# EAGLE board LED_strip (EAGLE 6.4)
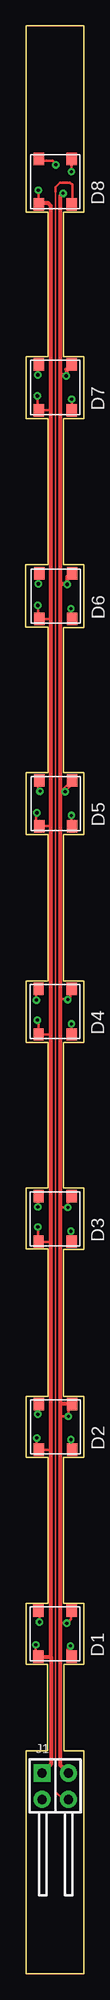
[diagram p0: board, top side]
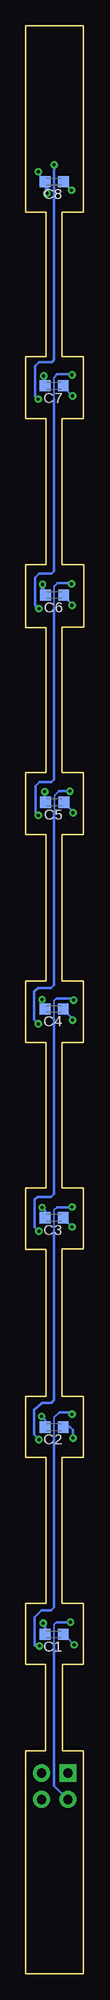
[diagram p1: board, bottom side, seen from below]

Size 5.62 x 187.51 mm. Coordinates in mm from the lower left corner, seen from the top.
Outline: 0.05,187.51 5.62,187.51 5.62,169.57 3.65,169.57 3.65,155.65 5.62,155.65 5.62,149.71 3.65,149.71 3.65,135.63 5.62,135.63 5.62,129.59 3.65,129.59 3.65,115.62 5.62,115.62 5.62,109.67 3.65,109.67 3.65,95.55 5.62,95.55 5.62,89.66 3.65,89.66 3.65,75.64 5.62,75.64 5.62,69.7 3.65,69.7 3.65,55.57 5.62,55.57 5.62,49.68 3.65,49.68 3.65,35.66 5.62,35.66 5.62,29.77 3.7,29.77 3.7,21.44 5.62,21.44 5.62,0 0.05,0 0.05,21.44 2.07,21.44 2.07,29.77 0.05,29.77 0.05,35.66 2.13,35.66 2.13,49.68 0.05,49.68 0.05,55.57 2.13,55.57 2.13,69.75 0.05,69.75 0.05,75.64 2.13,75.64 2.13,89.66 0.05,89.66 0.05,95.55 2.13,95.55 2.13,109.67 0.05,109.67 0.05,115.62 2.13,115.62 2.13,129.64 0,129.64 0,135.63 2.13,135.63 2.13,149.71 0.05,149.71 0.05,155.65 2.13,155.65 2.13,169.57 0.05,169.57 0.05,187.51
Copper layers (1*16): Top 0.035mm / dielectric 1.5mm / Bottom 0.035mm
Design rules "default": minimum track width 10mil, minimum drill 24mil, track to track 8mil, track to pad 8mil, pad to pad 8mil, via to via 8mil, smd to smd 8mil, copper to edge 40mil, drill to drill 8mil, minimum pad ring 10mil, minimum via ring 8mil, stop-mask expansion 4mil, vias tented up to drill 0mil, thermal gap 10mil

## Footprints (pad centres in the part's own frame; a part is rotated, then mirrored left to right if it is on the bottom)
C0603K = smd 1.05 x 1.08: 1 -0.875,0; 2 0.875,0
WS2812B = smd 1.2 x 1: DI 4.4,0; DO 0,-3.2; VDD 0,0; VSS 4.4,-3.2
2X2P-2.54 = drill 0.889 pad 1.651 square: 1 -1.27,1.27 | drill 0.889 pad 1.651: 2 -1.27,-1.27; 3 1.27,-1.27; 4 1.27,1.27

## Placement (x,y rotation side)
C1  [C0603K]  2.89,32.67 180 bottom
C2  [C0603K]  2.88,52.62 180 bottom
C3  [C0603K]  2.89,72.77 180 bottom
C4  [C0603K]  2.89,92.87 180 bottom
C5  [C0603K]  2.83,112.77 180 bottom
C6  [C0603K]  2.84,132.71 180 bottom
C7  [C0603K]  2.89,152.87 180 bottom
C8  [C0603K]  2.88,172.51 180 bottom
D1  [WS2812B]  1.21,30.52 90 top
D2  [WS2812B]  1.26,50.43 90 top
D3  [WS2812B]  1.23,70.46 90 top
D4  [WS2812B]  1.23,90.41 90 top
D5  [WS2812B]  1.28,110.46 90 top
D6  [WS2812B]  1.28,130.41 90 top
D7  [WS2812B]  1.25,150.51 90 top
D8  [WS2812B]  1.24,170.31 90 top
J1  CONNECTOR-HEADER-2X2P  [2X2P-2.54]  2.84,18.03 0 top

## Library data of the parts
C1-C8 = resistor
D1-D8 = lumex
J1 = OPL Eagle Library

## Nets
+5V: C1.1 C2.1 C3.1 C4.1 C5.1 C6.1 C7.1 C8.1 D1.VDD D2.VDD D3.VDD D4.VDD D5.VDD D6.VDD D7.VDD D8.VDD J1.1
DIN: D1.DI J1.2
DOUT: D8.DO J1.3
GND: C1.2 C2.2 C3.2 C4.2 C5.2 C6.2 C7.2 C8.2 D1.VSS D2.VSS D3.VSS D4.VSS D5.VSS D6.VSS D7.VSS D8.VSS J1.4
N$1: D1.DO D2.DI
N$2: D2.DO D3.DI
N$3: D3.DO D4.DI
N$4: D4.DO D5.DI
N$5: D5.DO D6.DI
N$6: D6.DO D7.DI
N$7: D7.DO D8.DI

## Tracks (layer width: path | path; a pad name or v marks a point on that pad's centre or on a via)
+5V  (via drill 0.3)
  Top 0.254: v0.96,31.65 0.96,30.73 D1.VDD 1.21,30.48 | v1.06,51.56 1.06,50.54 D2.VDD 2.23,50.43 2.43,50.24 | v1.11,91.79 1.13,91.77 1.23,91.77 D4.VDD 2.29,90.41 2.43,90.27 | v1.06,111.76 1.01,111.71 1.01,111 1.13,110.87 D5.VDD 2.3,110.46 2.43,110.34 | v1.16,131.72 1.16,130.44 D6.VDD 2.32,130.41 2.43,130.3 | v1.11,151.89 1.11,150.53 D7.VDD 2.28,150.51 2.28,150.46 2.43,150.31 | v1.21,171.7 1.21,170.34 D8.VDD | 2.43,70.61 2.28,70.46 D3.VDD 1.16,70.49 v1.16,71.88
  Top 0.406: 2.43,30.48 2.43,50.24 2.43,70.61 2.43,90.27 2.43,110.34 2.43,130.3 2.43,150.31 2.43,170.18 2.18,170.43 1.36,170.43 D8.VDD | 1.21,30.48 2.43,30.48 | 2.43,30.48 2.43,20.17 J1.1
  Bottom 0.254: C1.1 1.71,32.4 v0.96,31.65 | C2.1 1.35,52.62 1.06,52.32 v1.06,51.56 | C4.1 1.11,91.97 v1.11,91.79 | C5.1 1.06,111.87 v1.06,111.76 | C6.1 1.96,132.62 1.16,131.82 v1.16,131.72 | C7.1 2.01,152.79 v1.11,151.89 | C8.1 2.01,172.5 v1.21,171.7 | C3.1 2.01,72.73 v1.16,71.88
DIN  (via drill 0.3)
  Top 0.254: v1.31,33.83 1.31,34.77 D1.DI
  Bottom 0.152: 2.89,31.7 2.89,33.63 2.68,33.83
  Bottom 0.254: 2.68,33.83 v1.31,33.83 | J1.2 2.89,18.08 2.89,31.7
DOUT
  Top 0.152: 2.89,171.55 2.89,17.5
  Top 0.254: J1.3 3.62,16.76 2.89,17.5 | D8.DO 4.48,170.31 4.48,172.21 4.28,172.41 3.58,172.41 3.29,172.41 2.89,172.01 2.89,171.55
GND  (via drill 0.3)
  Top 0.254: v4.06,93.77 4.11,93.83 | v3.8,113.79 4.33,114.32 D5.VSS 4.33,114.78 3.35,113.79 | 4.21,134.69 D6.VSS | v3.9,153.82 3.9,153.87 | 3.9,154.43 3.9,154.52 D7.VSS | v4.41,173.48 4.41,174.68 D8.VSS | 4.36,34.75 4.36,34.14 v3.95,33.73 | D4.VSS 4.33,94.05 4.11,93.83 | 4.11,93.83 3.4,93.83 3.35,93.77 | 3.35,73.76 v4.06,73.76 4.06,74.59 D3.VSS | D1.VSS 4.36,34.09 4.06,33.78 3.35,33.78 | 3.35,53.69 3.4,53.64 v4.11,53.64 4.11,54.58 D2.VSS
  Top 0.406: D1.VSS 4.36,34.75 | D2.VSS 3.37,54.83 | 3.35,133.75 3.35,113.79 3.35,93.77 3.35,73.76 3.35,53.69 3.35,33.78 3.35,20.06 J1.4 | 3.35,133.75 3.35,153.82 | 3.35,153.82 3.35,171.14 v3.6,171.4 | D7.VSS 4.24,154.77 3.9,154.43 3.9,153.87 3.4,153.87 3.35,153.82 | 3.35,133.75 v4.01,133.75 4.01,134.48 D6.VSS
  Bottom 0.254: C2.2 3.76,53.29 v4.11,53.64 | C4.2 4.06,93.16 v4.06,93.77 | C5.2 3.8,112.86 v3.8,113.79 | C7.2 3.76,153.68 v3.9,153.82 | C8.2 3.76,172.57 4.41,173.23 v4.41,173.48 | C1.2 3.76,33.54 v3.95,33.73 | C3.2 3.76,73.46 v4.06,73.76
  Bottom 0.406: v3.6,171.4 3.6,172.35 C8.2 | v4.01,133.75 4.01,133.01 C6.2
N$1  (via drill 0.3)
  Top 0.254: D1.DO 4.13,30.96 | 4.13,30.96 4.01,31.19 | v1.16,53.85 1.16,54.83 D2.DI | v4.31,31.54 4.31,31.14 4.13,30.96
  Bottom 0.152: 2.89,51.46 2.89,53.54 2.38,54.05
  Bottom 0.254: 4.77,31.6 4.77,31.8 | 4.77,31.8 4.77,34.29 4.11,34.95 3.19,34.95 2.89,35.25 2.89,51.46 | 2.38,54.05 1.36,54.05 v1.16,53.85 | v4.31,31.54 4.51,31.54 4.77,31.8
N$2  (via drill 0.3)
  Top 0.254: D2.DO v4.36,51.41 | v1.16,73.81 1.16,74.83 D3.DI
  Bottom 0.152: 2.89,71.52 2.89,73.51 2.63,73.76
  Bottom 0.254: v4.36,51.41 4.36,51.46 4.82,51.92 4.82,54.25 4.06,54.96 3.14,54.96 2.89,55.22 2.89,71.52 | 2.63,73.76 1.21,73.76 v1.16,73.81
N$3  (via drill 0.3)
  Top 0.254: D3.DO 4.33,71.44 v4.36,71.47 | v1.01,93.72 1.01,94.69 D4.DI
  Bottom 0.152: 2.89,91.84 2.89,93.67 2.68,93.88
  Bottom 0.254: v4.36,71.47 4.77,71.88 4.77,74.52 4.51,74.78 3.19,74.78 2.89,75.08 2.89,91.84 | 2.68,93.88 1.16,93.88 v1.01,93.72
N$4  (via drill 0.3)
  Top 0.254: D4.DO 4.41,90.49 v4.41,91.44 | v1.36,113.84 1.13,113.92 D5.DI
  Bottom 0.152: 2.89,95.2 2.84,113.43 2.43,113.84
  Bottom 0.254: v4.41,91.44 4.82,91.84 4.82,94.54 4.46,94.89 3.19,94.89 2.89,95.2 2.89,111.71 2.84,111.71 | 2.43,113.84 v1.36,113.84
N$5  (via drill 0.3)
  Top 0.254: D5.DO 4.41,110.54 v4.41,111.5 | v1.21,133.8 1.21,134.73 D6.DI
  Bottom 0.152: 2.89,131.47 2.89,133.55 2.58,133.86
  Bottom 0.254: v4.41,111.5 4.41,111.55 4.67,111.81 4.67,114.35 4.31,114.7 3.14,114.7 2.89,114.96 2.89,131.47 | 2.58,133.86 1.26,133.86 v1.21,133.8
N$6  (via drill 0.3)
  Top 0.254: D6.DO 4.33,131.39 v4.36,131.42 | v1.16,153.92 1.16,154.74 D7.DI
  Bottom 0.152: 2.89,151.58 2.89,153.67 2.63,153.97
  Bottom 0.254: v4.36,131.42 4.72,131.77 4.72,134.41 4.36,134.77 3.14,134.77 2.89,135.02 2.89,151.58 | 2.63,153.97 1.21,153.97 v1.16,153.92
N$7  (via drill 0.3)
  Top 0.254: D7.DO v4.45,151.58 v4.44,151.58 | v2.89,174.14 2.89,174.22 2.56,174.55 1.41,174.55 D8.DI
  Bottom 0.254: v4.44,151.58 4.74,151.89 4.74,154.76 4.34,155.17 3.09,155.17 2.89,155.37 v2.89,174.14